# Altium PCB P_ground.PcbDoc
Units mm, origin at the board's own origin, x right, y up, seen from the top; angles counter-clockwise.
Board outline 90.04 x 86.03 mm, 2 copper layers (Top Layer, Bottom Layer); 9 components, 62 nets, 112 pads, 1 vias.
Unrouted connection lines stored in the file: 19.
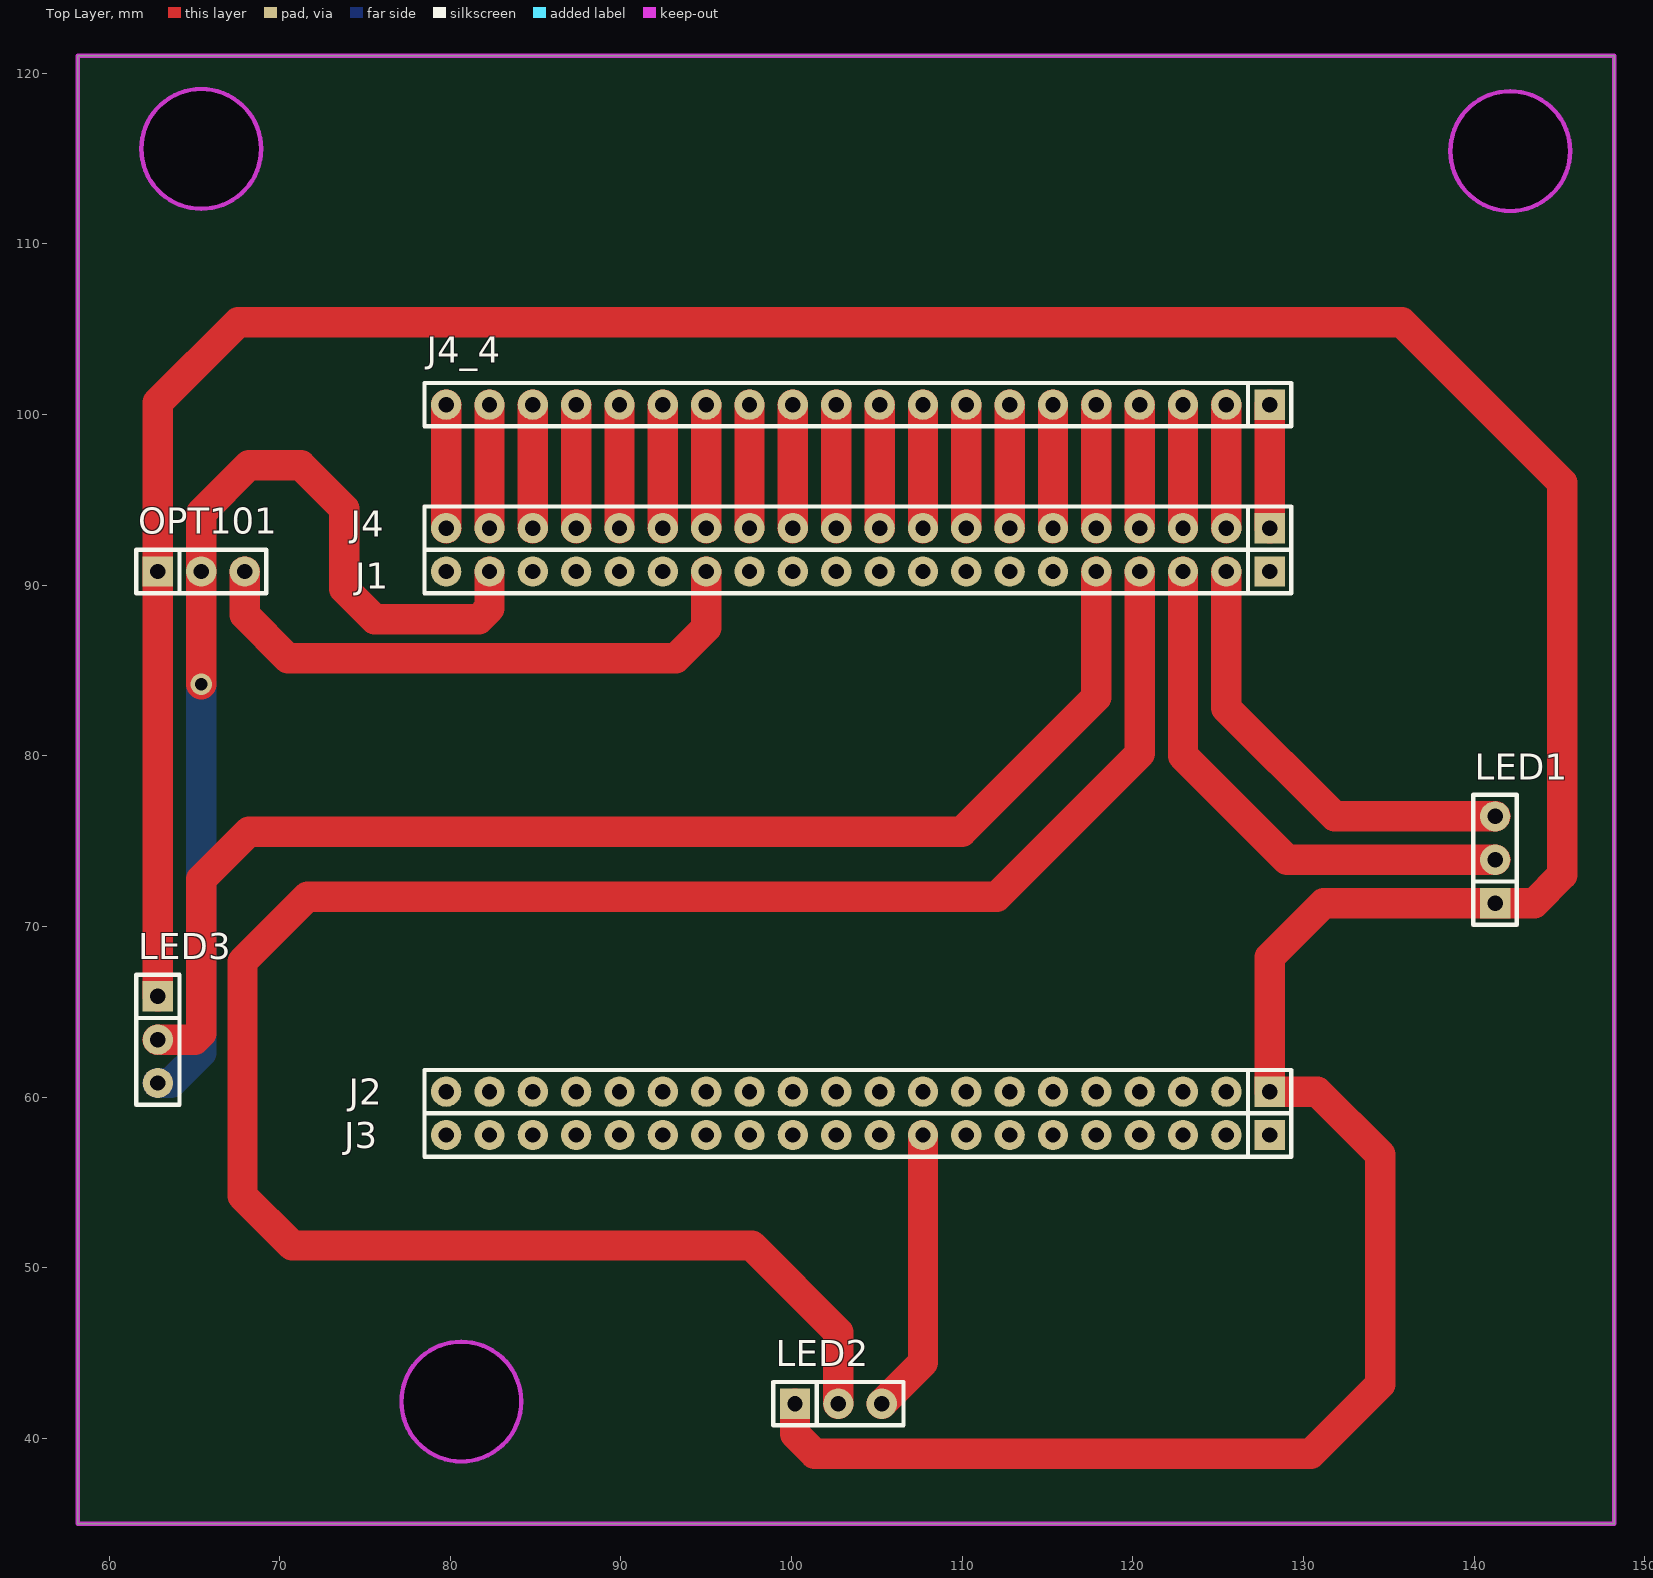
[diagram p0: Top Layer view]
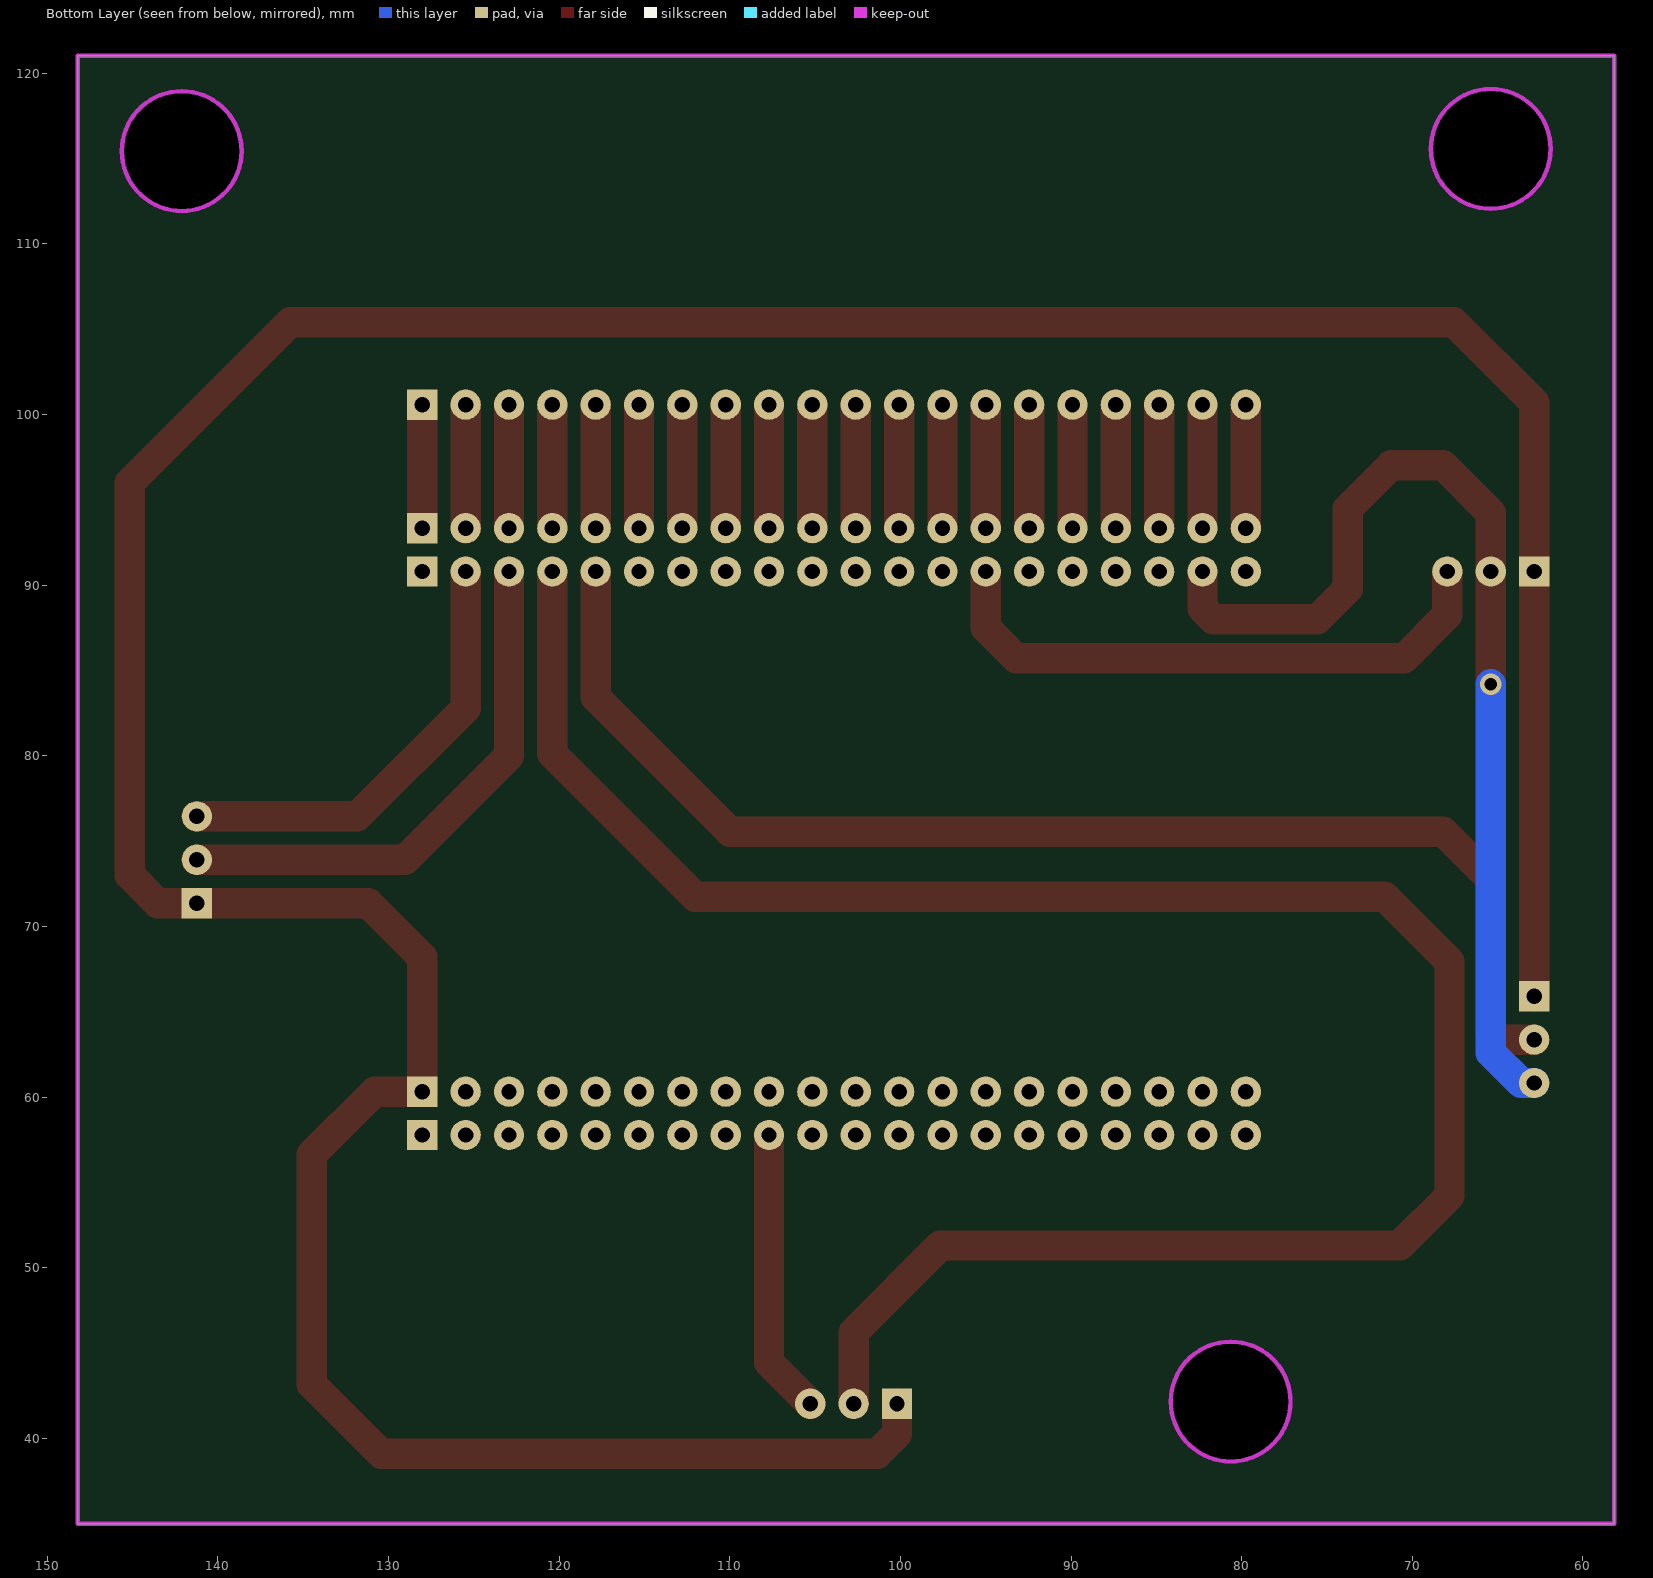
[diagram p1: Bottom Layer view, seen from below]

## Layer stack, top to bottom
Top Layer: signal copper 0.0356
Dielectric: dielectric 0.32, FR-4, Dk 4.8
Bottom Layer: signal copper 0.0356

## Board outline
58.166,35 58.166,121.031 148.209,121.031 148.209,35
cut-out: 80.645,38.654 cw(c80.645,42.164) 77.135,42.164 cw(c80.645,42.164) 80.645,45.674 cw(c80.645,42.164) 84.155,42.164 cw(c80.645,42.164)
cut-out: 142.113,111.933 cw(c142.113,115.443) 138.603,115.443 cw(c142.113,115.443) 142.113,118.953 cw(c142.113,115.443) 145.623,115.443 cw(c142.113,115.443)
cut-out: 65.405,112.06 cw(c65.405,115.57) 61.895,115.57 cw(c65.405,115.57) 65.405,119.08 cw(c65.405,115.57) 68.915,115.57 cw(c65.405,115.57)

## Design rules (kind name [scope] priority, off if disabled: settings)
Clearance [All] p1: gap=0.254
PolygonConnect [All] p1: connectstyle=Relief reliefconductorwidth=0.254 reliefentries=4 polygonreliefangle="90 Angle" airgapwidth=0.254
RoutingVias [All] p1: holewidth=0.711 width=1.27 viastyle="Through Hole" minholewidth=0.711 minwidth=1.27 maxholewidth=0.711 maxwidth=1.27
SolderMaskExpansion [All] p1: expansion=0.102
Width [All] p1: maxlimit=2.032 minlimit=0.254 preferedwidth=1.778 minimp=50.000000 maximp=50.000000 favimp=50.000000
28 further rules are at their usual default settings.

## Components (designator, comment, footprint, x,y, rotation, side; value= is the part's Value field where it differs from the comment)
J1 "CON20" sip-20 128.016,90.805 r180 top
J2 "CON20" sip-20 128.016,60.325 r180 top
J3 "CON20" sip-20 128.016,57.785 r180 top
J4 "CON20" sip-20 128.016,93.345 r180 top
J4_4 "CON20" sip-20 128.016,100.584 r180 top
LED1 "CON3" SIP-3 141.224,71.374 r90 top
LED2 "CON3" SIP-3 100.203,42.037 r0 top
LED3 "CON3" SIP-3 62.865,65.913 r270 top
OPT101 "CON3" SIP-3 62.865,90.805 r0 top

## Footprints (in the part's own frame and the unit in brackets; to place one, negate y for a bottom-side part, rotate by r counter-clockwise, add the part's x,y. Pads: shape width x height; smd on the part's side, far side on the other; paste and mask are expansions set on the pad)
SIP-3 [mil]
  rect 70x70 hole 35.43: 1(0,0)
  round 70 hole 35.43: 2(100,0) 3(200,0)
  silkscreen extent -50,-50 250,50
sip-20 [mil]
  rect 70x70 hole 35.43: 1(0,0)
  round 70 hole 35.43: 2(100,0) 3(200,0) 4(300,0) 5(400,0) 6(500,0) 7(600,0) 8(700,0) 9(800,0) 10(900,0) 11(1000,0) 12(1100,0) 13(1200,0) 14(1300,0) 15(1400,0) 16(1500,0) 17(1600,0) 18(1700,0) 19(1800,0) 20(1900,0)
  silkscreen extent -50,-50 1950,50

## Part data
J1 J2 J3 J4 J4_4 LED1 LED2 LED3 OPT101: "Connector"

## Via types
v1: diameter 1.27, hole 0.711, Top Layer to Bottom Layer, 1 vias

## Nets (pads, with @x,y where several pads share a name; then routed paths per layer and width w, separated by ;. In a path a pad name is that pad's centre, name@x,y a point inside that pad or via, vN(x,y) a via of type N, cw(c..) or ccw(c..) an arc to the next point about the centre after c; other vN are vias at no path point)
3V3: J1.20 J2.20 J3.1 J3.2 J3.3 J3.4 J3.5
5V: J1.1 J2.1 J3.20 LED1.1 LED2.1 LED3.1 OPT101.1 | length 232.6
  Top Layer w1.778: LED3.1 OPT101.1 62.865,100.711 67.564,105.41 135.763,105.41 145.161,96.012 145.161,73.025 143.51,71.374 LED1.1 131.191,71.374 128.016,68.199 J2.1 130.81,60.325 134.493,56.642 134.493,43.18 130.429,39.116 101.346,39.116 100.203,40.259 LED2.1
GND: J1.2 J1.19 J2.2 J2.19 J3.6 J3.7 J3.8 J3.9 J3.16 J3.17 J3.18 J3.19 LED1.3 LED2.3 LED3.3 OPT101.2 | length 105
  Top Layer w1.778: v1(65.405,84.201) OPT101.2 65.405,94.234 68.199,97.028 71.247,97.028 73.787,94.488 73.787,89.789 75.565,88.011 81.661,88.011 82.296,88.646 J1.19 ; LED2.3 107.696,44.45 J3.9 ; J1.2 125.476,82.804 131.826,76.454 LED1.3
  Bottom Layer w1.778: LED3.3 63.627,60.833 65.405,62.611 v1(65.405,84.201)
NetJ4_1: J4.1 J4_4.1 | length 7.2
  Top Layer w1.778: J4.1 J4_4.1
NetJ4_2: J4.2 J4_4.2 | length 7.2
  Top Layer w1.778: J4.2 J4_4.2
NetJ4_3: J4.3 J4_4.3 | length 7.2
  Top Layer w1.778: J4.3 J4_4.3
NetJ4_4: J4.4 J4_4.4 | length 7.2
  Top Layer w1.778: J4.4 J4_4.4
NetJ4_5: J4.5 J4_4.5 | length 7.2
  Top Layer w1.778: J4.5 J4_4.5
NetJ4_6: J4.6 J4_4.6 | length 7.2
  Top Layer w1.778: J4.6 J4_4.6
NetJ4_7: J4.7 J4_4.7 | length 7.2
  Top Layer w1.778: J4.7 J4_4.7
NetJ4_8: J4.8 J4_4.8 | length 7.2
  Top Layer w1.778: J4.8 J4_4.8
NetJ4_9: J4.9 J4_4.9 | length 7.2
  Top Layer w1.778: J4.9 J4_4.9
NetJ4_10: J4.10 J4_4.10 | length 7.2
  Top Layer w1.778: J4.10 J4_4.10
NetJ4_11: J4.11 J4_4.11 | length 7.2
  Top Layer w1.778: J4.11 J4_4.11
NetJ4_12: J4.12 J4_4.12 | length 7.2
  Top Layer w1.778: J4.12 J4_4.12
NetJ4_13: J4.13 J4_4.13 | length 7.2
  Top Layer w1.778: J4.13 J4_4.13
NetJ4_14: J4.14 J4_4.14 | length 7.2
  Top Layer w1.778: J4.14 J4_4.14
NetJ4_15: J4.15 J4_4.15 | length 7.2
  Top Layer w1.778: J4.15 J4_4.15
NetJ4_16: J4.16 J4_4.16 | length 7.2
  Top Layer w1.778: J4.16 J4_4.16
NetJ4_17: J4.17 J4_4.17 | length 7.2
  Top Layer w1.778: J4.17 J4_4.17
NetJ4_18: J4.18 J4_4.18 | length 7.2
  Top Layer w1.778: J4.18 J4_4.18
NetJ4_19: J4.19 J4_4.19 | length 7.2
  Top Layer w1.778: J4.19 J4_4.19
NetJ4_20: J4.20 J4_4.20 | length 7.2
  Top Layer w1.778: J4.20 J4_4.20
P00: J1.3 LED1.2 | length 31.6
  Top Layer w1.778: J1.3 122.936,80.01 129.032,73.914 LED1.2
P01: J1.4 LED2.2 | length 124.4
  Top Layer w1.778: LED2.2 102.743,46.228 97.663,51.308 70.739,51.308 67.818,54.229 67.818,67.945 71.628,71.755 112.014,71.755 120.396,80.137 J1.4
P02: J1.5 LED3.2 | length 76
  Top Layer w1.778: LED3.2 65.024,63.373 65.405,63.754 65.405,72.771 68.199,75.565 109.982,75.565 117.856,83.439 J1.5
P03: J1.6
P04: J1.7
P05: J1.8
P06: J1.9
P07: J1.10
P10: J1.11
P11: J1.12
P12: J1.13
P13: J1.14 OPT101.3 | length 34.7
  Top Layer w1.778: OPT101.3 67.945,88.265 70.485,85.725 93.218,85.725 94.996,87.503 J1.14
P14: J1.15
P15: J1.16
P16: J1.17
P17: J1.18
P20: J2.11
P21: J2.12
P22: J2.13
P23: J2.14
P24: J2.15
P25: J2.16
P26: J2.17
P27: J2.18
P30: J2.3
P31: J2.4
P32: J2.5
P33: J2.6
P34: J2.7
P35: J2.8
P36: J2.9
P37: J2.10
P50: J3.10
P51: J3.11
P52: J3.12
P53: J3.13
P54: J3.14
P55: J3.15
VCC: 

## Keep-outs
Keep-Out Layer:
  circle w0.254: c80.645,42.164 r3.51
  circle w0.254: c142.113,115.443 r3.51
  circle w0.254: c65.405,115.57 r3.51
  lines w0.254: 58.166,35 58.166,121.031 148.209,121.031 148.209,35 58.166,35